# Altium PCB MyECGPCB_V1.2.9.1.PcbDoc
Units mil, origin at the board's own origin, x right, y up, seen from the top; angles counter-clockwise.
Board outline 3250 x 3250 mil, 2 copper layers (Top Layer, Bottom Layer); 151 components, 107 nets, 475 pads, 167 vias.
Unrouted connection lines stored in the file: 65.
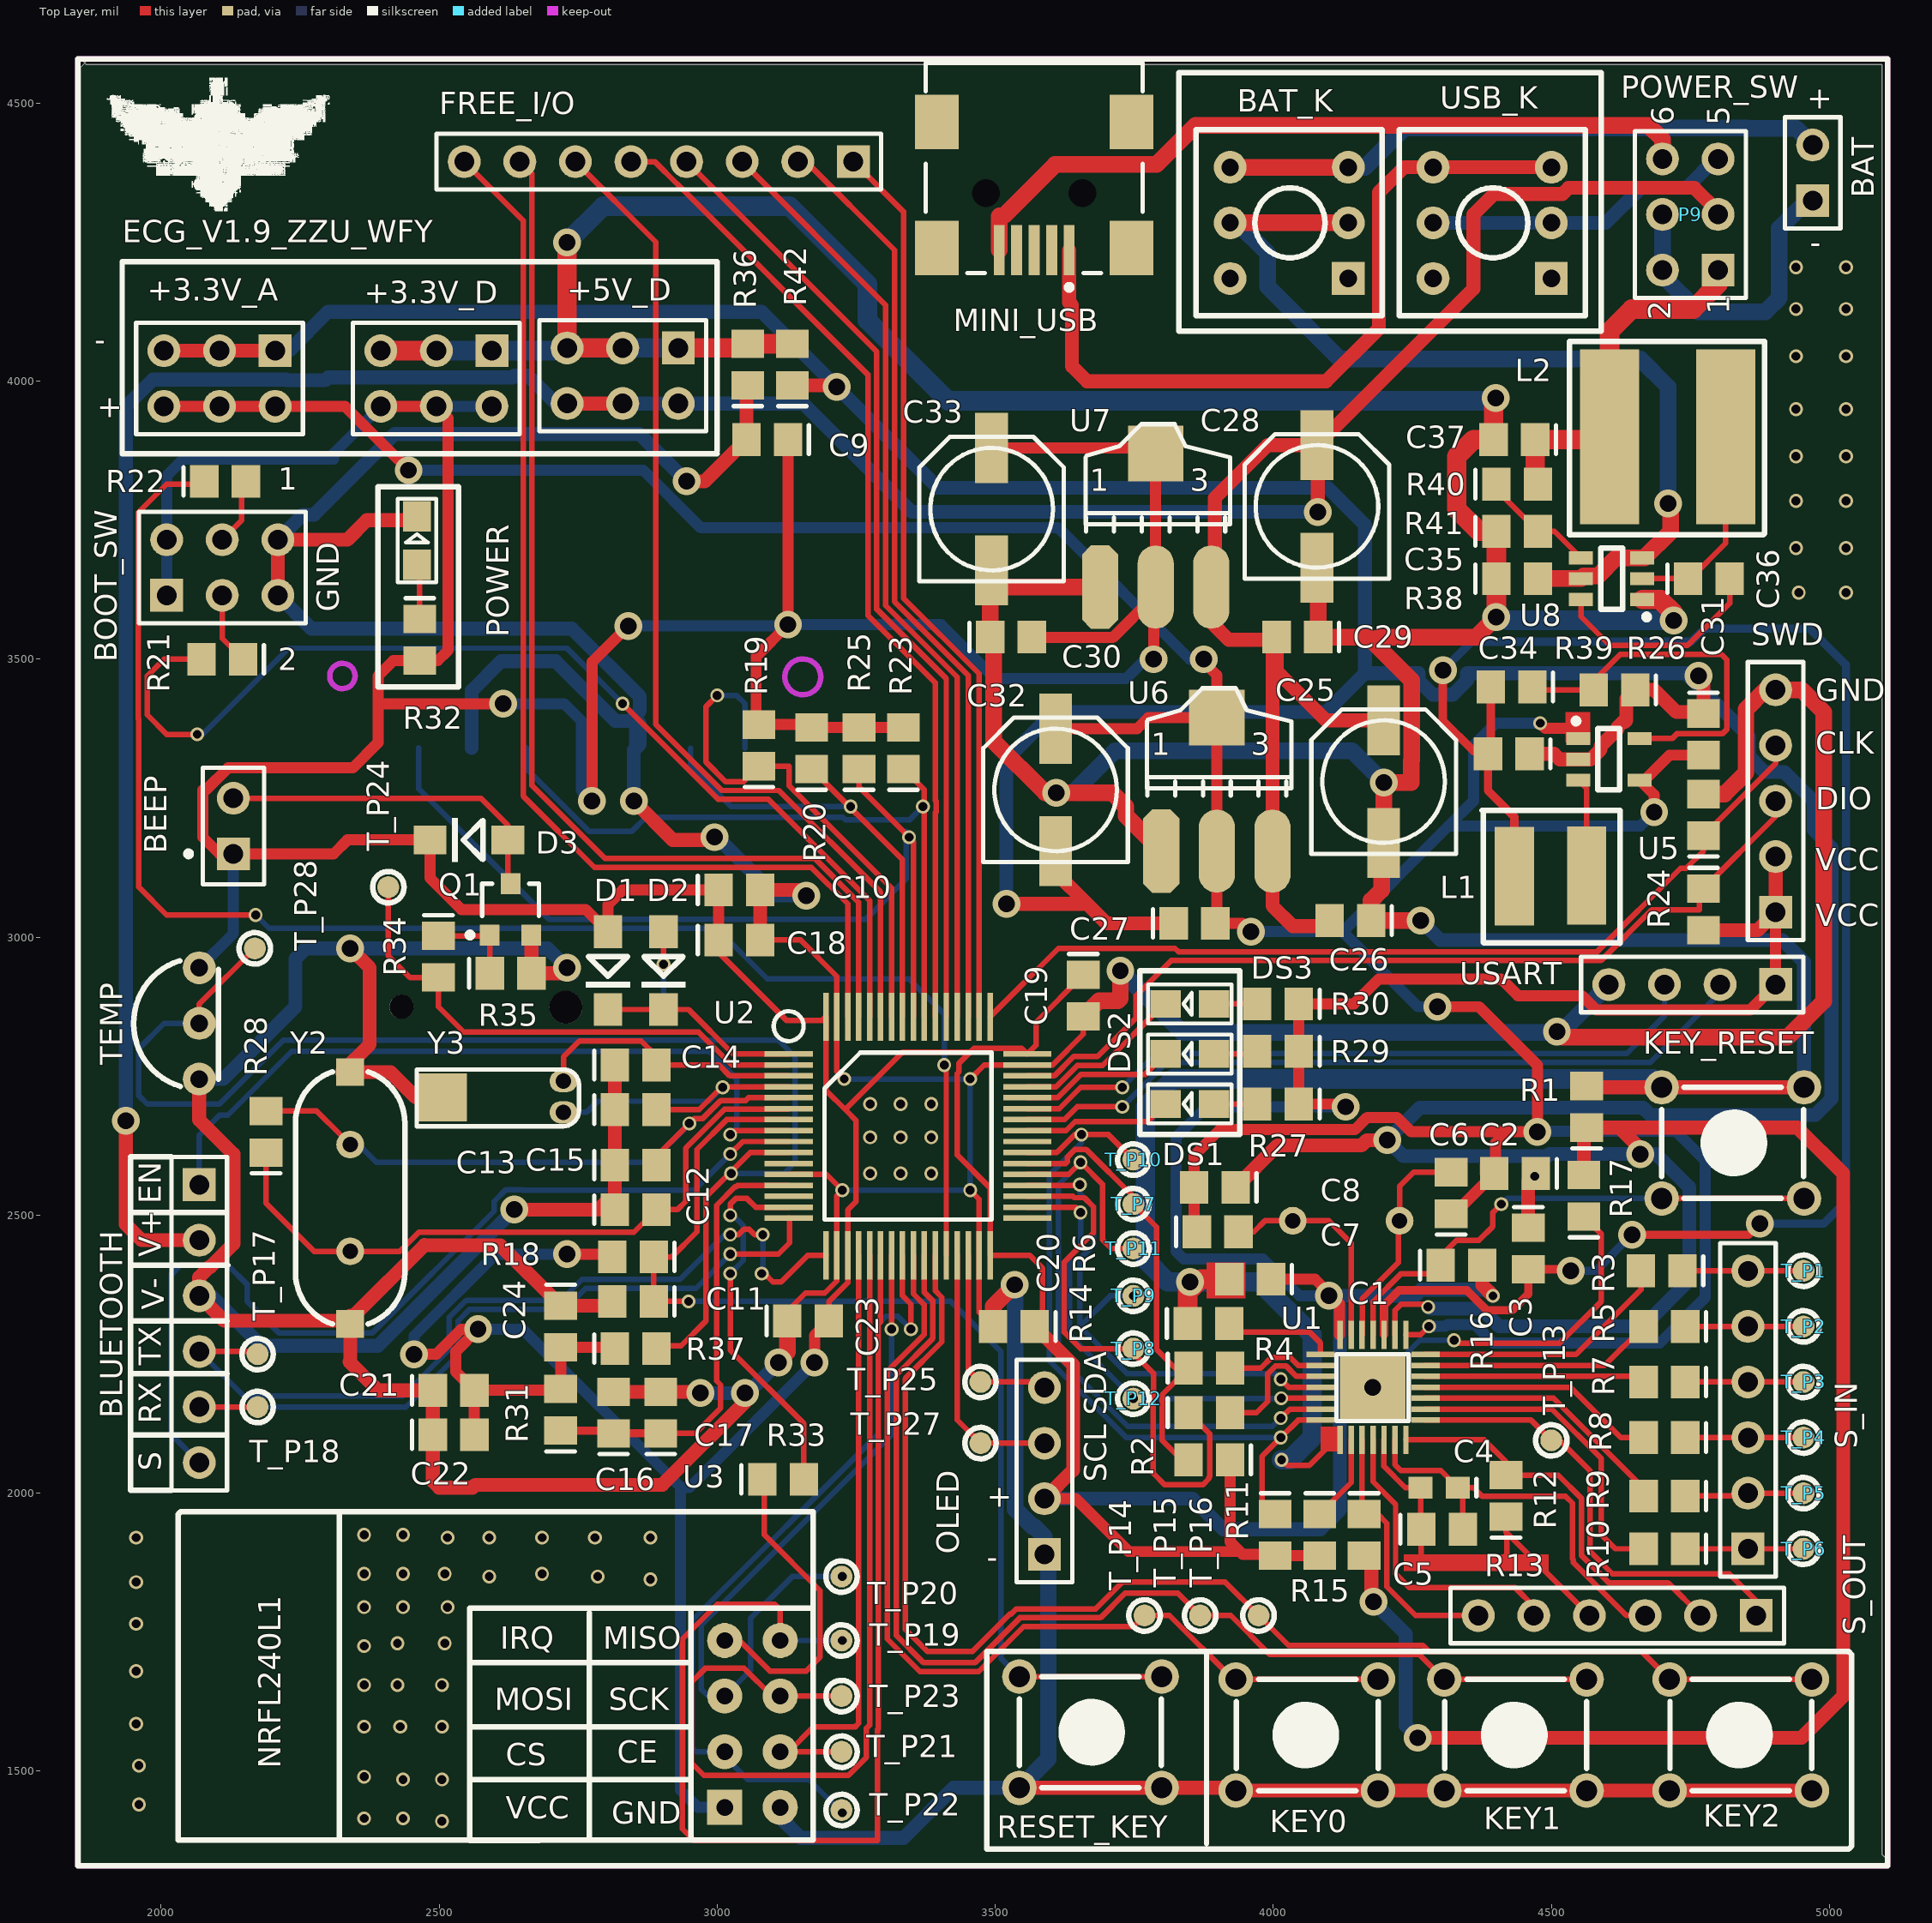
[diagram p0: Top Layer view]
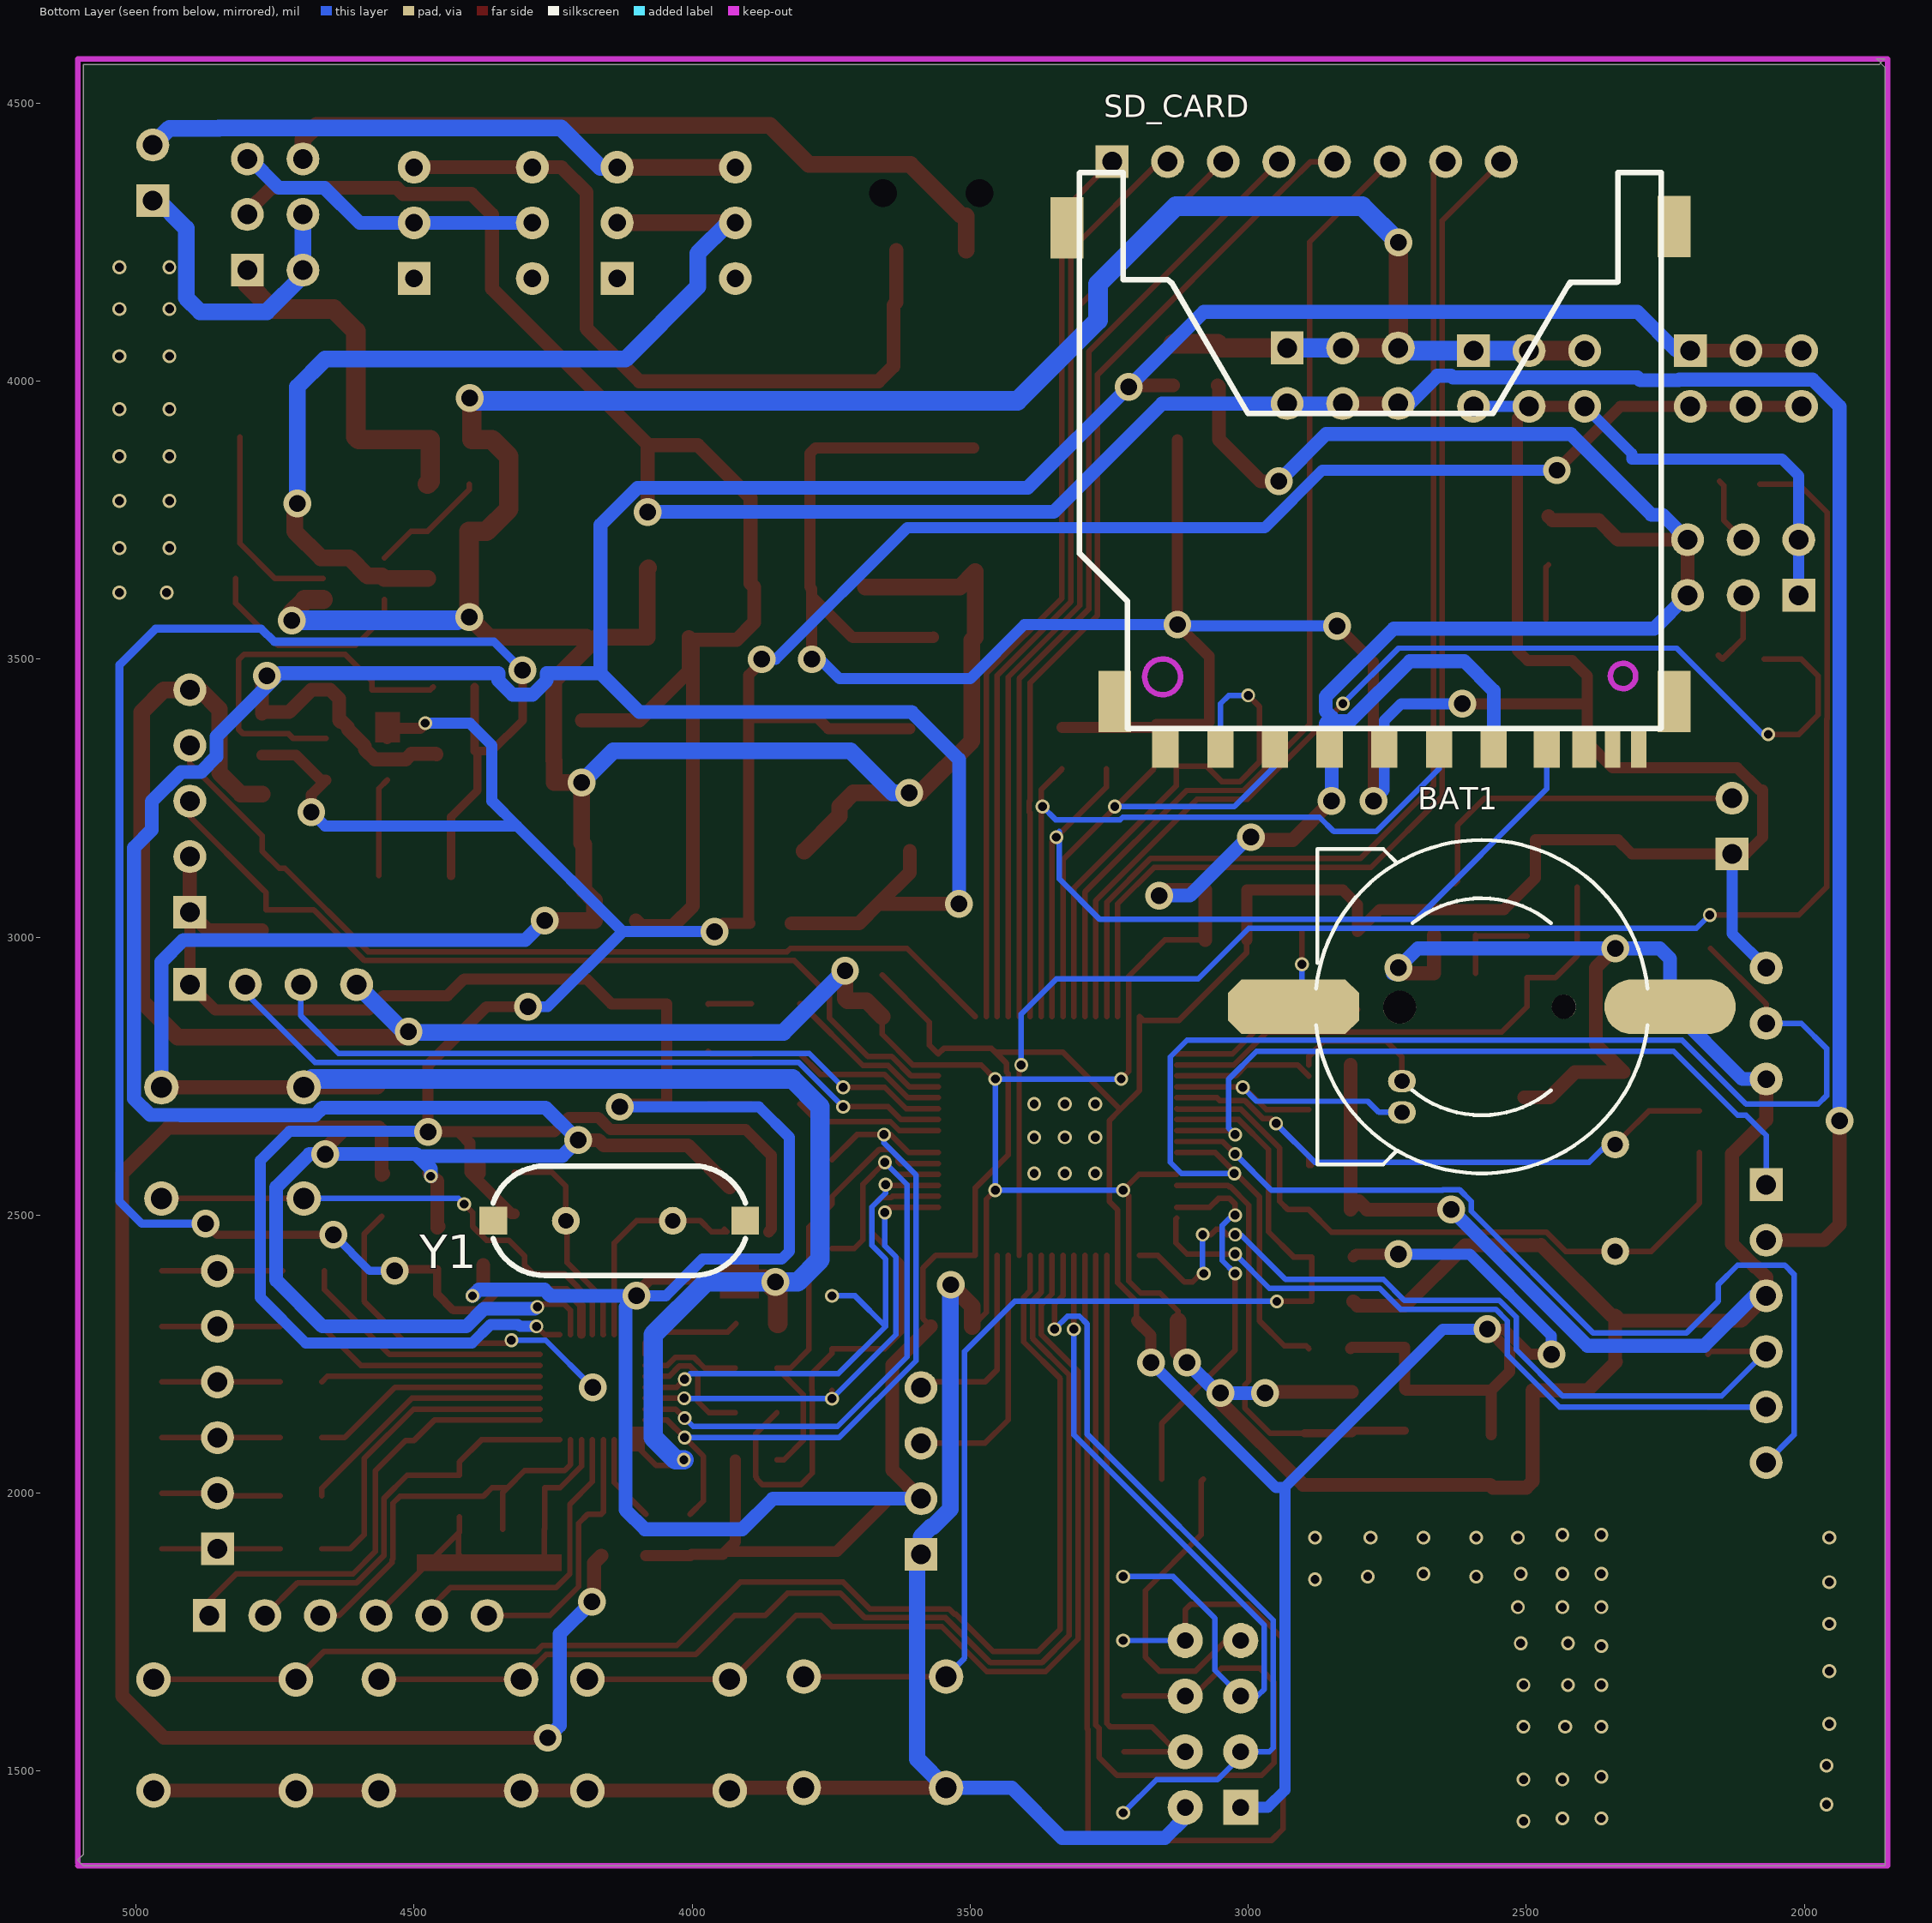
[diagram p1: Bottom Layer view, seen from below]

## Layer stack, top to bottom
Top Solder: solder mask 0.4, Solder Resist, Dk 3.5
Top Layer: signal copper 1.4
Dielectric 1: dielectric 12.6, FR-4, Dk 4.8
Bottom Layer: signal copper 1.4
Bottom Solder: solder mask 0.4, Solder Resist, Dk 3.5

## Board outline
1855,4580 1865,4570 5095,4570 5095,1350 5105,1340 5095,1330 1855,1330 1855,4565 1870,4580

## Design rules (kind name [scope] priority, off if disabled: settings)
Clearance [All] p1: gap=6
PolygonConnect [All] p1: connectstyle=Relief reliefconductorwidth=10 reliefentries=4 polygonreliefangle="90 Angle" airgapwidth=10
RoutingVias [All] p1: holewidth=28 width=50 viastyle="Through Hole" minholewidth=16 minwidth=25 maxholewidth=28 maxwidth=50
SolderMaskExpansion [All] p1: expansion=4
Width [All] p1: maxlimit=40 minlimit=10 preferedwidth=10 minimp=50.000000 maximp=50.000000 favimp=50.000000
30 further rules are at their usual default settings.

## Classes and differential pairs
component class U_PowerSheet: +3.3V_A +3.3V_D +5V_D BAT BAT_K C25 C26 C27 C28 C29 C30 C31 C32 C34 C35 C36 C37 L1 L2 MINI_USB P9 R38 R39 R40 R41 R42 U5 U6 U7 U8 USB_K
component class U_MCUSheet: BAT1 BEEP BLUETOOTH BOOT_SW C9 C10 C11 C12 C13 C14 C15 C16 C17 C18 C19 C20 C21 C22 C23 C24 D1 D2 D3 DS1 DS2 DS3 FREE_I/O KEY0 KEY1 KEY2 OLED POWER Q1 R18 R19 R20 R21 R22 R23 R24 R25 R26 R27 R28 R29 R30 R31 R32 R33 R34 R35 R36 R37 RESET_KEY SD_CARD SWD T_P14 T_P15 T_P16 T_P17 T_P18 T_P19 T_P20 T_P21 T_P22 T_P23 T_P24 T_P25 T_P27 T_P28 TEMP U2 U3 USART Y2 Y3
component class U_FrontEndSheet: C1 C2 C3 C4 C5 C6 C7 C8 KEY_RESET R1 R2 R3 R4 R5 R6 R7 R8 R9 R10 R11 R12 R13 R14 R15 R16 R17 S_IN S_OUT T_P1 T_P2 T_P3 T_P4 T_P5 T_P6 T_P7 T_P8 T_P9 T_P10 T_P11 T_P12 T_P13 U1

## Components (designator, comment, footprint, x,y, rotation, side; value= is the part's Value field where it differs from the comment)
+3.3V_A "+3.3V_A" HDR2X3 2205,4055 r180 top (schematic designator VOUT4)
+3.3V_D "+3.3V_D" HDR2X3 2595,4055 r180 top (schematic designator VOUT3)
+5V_D "+5V_D" HDR2X3 2930,4060 r180 top (schematic designator VOUT2)
BAT "Header 2" HDR1X2 4970,4325 r90 top (schematic designator P8)
BAT1 "BATT" BATM 2580,2875 r270 bottom
BAT_K "BUTTON" BTN8.5*8.5 4135,4185 r180 top (schematic designator K2)
BEEP "Speaker" PIN2 2130,3150 r90 top (schematic designator LS1)
BLUETOOTH "Header 6" HDR1X6 2068.5,2555 r270 top (schematic designator P4)
BOOT_SW "VCC5" HDR2X3 2010,3615 r0 top (schematic designator VOUT1)
C1 "0.1uF" 0805 3958.5,2385 r180 top
C2 "0.1uF" 0805 4435,2575 r180 top
C3 "0.1uF" 0805 4458.5,2440 r270 top
C4 "1nF" 0603 4298.5,2010 r180 top
C5 "0.1uF" 0805 4163.5,1925 r270 top
C6 "22pF" 0805 4320,2540 r90 top
C7 "22pF" 0805 3900,2470 r0 top
C8 "0.1uF" 0805 3895,2550 r180 top
C9 "0.1uf" 0805 3090,3895 r180 top
C10 "0.1uF" 0805 3040,3085 r0 top
C11 "0.1uf" 0805 2848.5,2345 r180 top
C12 "22" 0805 2853.5,2510 r0 top
C13 "22" 0805 2853.5,2690 r0 top
C14 "22" 0805 2853.5,2770 r0 top
C15 "22" 0805 2853.5,2590 r0 top
C16 "10u" 0805 2898.5,2145 r90 top
C17 "0.1uf" 0805 2813.5,2145 r90 top
C18 "0.1uF" 0805 3040,2995 r0 top
C19 "104" 0805 3658.5,2895 r270 top
C20 "104" 0805 3533.5,2300 r180 top
C21 "10uF" 0805 2525.9,2185 r0 top
C22 "104" 0805 2525.9,2105 r0 top
C23 "104" 0805 3163.5,2310 r0 top
C24 "104" 0805 2718.5,2300 r270 top
C25 "220uF" CC6.56.5 4198.5,3280 r270 top
C26 "104" 0805 4138.5,3030 r180 top
C27 "104" 0805 3858.5,3025 r0 top
C28 "220uF" CC6.56.5 4078.5,3775 r270 top
C29 "104" 0805 4043.5,3540 r180 top
C30 "104" 0805 3528.5,3540 r0 top
C31 "4.7uf" 0805 4773.5,3365 r270 top
C32 "220uF" CC6.56.5 3608.5,3265 r270 top
C33 "220uF" CC6.56.5 3493.5,3770 r270 top
C34 "10uf" 0805 4423.5,3330 r180 top
C35 "10uf" 0805 4438.5,3645 r0 top
C36 "100nf" 0805 4783.5,3645 r0 top
C37 "22uf" 0805 4433.5,3895 r180 top
D1 "1N4148" DIODE_SOP 2803.5,3010 r270 top
D2 "1N4148" DIODE_SOP 2903.5,3010 r270 top
D3 "1N4148" DIODE_SOP 2623.5,3175 r180 top
DS1 "LED1" SMDLED 3893.5,2700 r180 top
DS2 "LED1" SMDLED 3893.5,2790 r180 top
DS3 "LED1" SMDLED 3893.5,2880 r180 top
FREE_I/O "Header 8" HDR1X8 3245,4395 r180 top (schematic designator P7)
KEY0 "KEY_M" KEY_M 4188.5,1465 r180 top
KEY1 "KEY_M" KEY_M 4563.5,1465 r180 top
KEY2 "KEY_M" KEY_M 4968.5,1465 r180 top
KEY_RESET "KEY_M" KEY_M 4698.5,2730 r0 top (schematic designator KEY?)
L1 "Inductor" SDR0403 4563.5,3110 r270 top
L2 "Inductor" SDR0805 4813.5,3900 r270 top
MINI_USB "USB" USB/SM0.8-6H5 3570,4545 r90 top (schematic designator USB_?)
OLED "Header 4" HDR1X4 3588.5,1890 r90 top (schematic designator P6)
P9 "Header 3X2" HDR2X3 4800,4200 r90 top
POWER "PWR" SMDLED 2460,3670 r90 top (schematic designator DS0)
Q1 "S8050" SOT-23R 2628.5,3045 r0 top
R1 "0" 0805 4563.5,2695 r90 top
R2 "1M" 0805 3885,2060 r180 top
R3 "0" 0805 4698.5,2400 r180 top
R4 "51" 0805 3885,2225 r0 top
R5 "0" 0805 4703.5,2300 r180 top
R6 "51" 0805 3885,2145 r0 top
R7 "0" 0805 4703.5,2200 r180 top
R8 "0" 0805 4703.5,2100 r180 top
R9 "0" 0805 4703.5,1995 r180 top
R10 "0" 0805 4703.5,1900 r180 top
R11 "1M" 0805 4003.5,1925 r270 top
R12 "10K" 0805 4418.5,1995 r90 top
R13 "10M" 0805 4303.5,1935 r0 top
R14 "1M" 0805 3883.5,2305 r0 top
R15 "1M" 0805 4083.5,1925 r270 top
R16 "1M" 0805 4338.5,2410 r0 top
R17 "0" 0805 4558.5,2535 r90 top
R18 "10K" 0805 2848.5,2425 r180 top
R19 "45K" 0805 3075,3345 r90 top
R20 "45K" 0805 3170,3340 r90 top
R21 "10K" 0805 2110,3500 r180 top
R22 "10K" 0805 2115,3820 r0 top
R23 "45K" 0805 3335,3340 r90 top
R24 "10K" 0805 4773.5,3050 r270 top
R25 "45K" 0805 3255,3340 r90 top
R26 "10K" 0805 4773.5,3220 r90 top
R27 "510" 0805 4008.5,2700 r180 top
R28 "1M" 0805 2188.5,2650 r90 top
R29 "510" 0805 4008.5,2795 r180 top
R30 "510" 0805 4008.5,2880 r180 top
R31 "10" 0805 2718.5,2150 r90 top
R32 "510" 0805 2465,3535 r270 top
R33 "4.7k" 0805 3118.5,2025 r0 top
R34 "1k" 0805 2498.5,2965 r270 top
R35 "10k" 0805 2628.5,2935 r0 top
R36 "0" 0805 3055,4030 r90 top
R37 "4.7K" 0805 2853.5,2260 r0 top
R38 "301K" 0805 4428.5,3450 r180 top
R39 "100K" 0805 4613.5,3445 r180 top
R40 "56.2K" 0805 4438.5,3815 r0 top
R41 "10K" 0805 4438.5,3730 r0 top
R42 "0" 0805 3135,4030 r90 top
RESET_KEY "KEY_M" KEY_M 3543.5,1670 r0 top
S_IN "输入" HDR1X6 4853.5,1900 r90 top (schematic designator P1)
S_OUT "Header 6" HDR1X6 4868.5,1780 r180 top (schematic designator P2)
SD_CARD "sd card" SDCARD_L 3050,3340 r0 bottom (schematic designator SD_CARD?)
SWD "Header 5" HDR1X5 4903.5,3045 r90 top (schematic designator P3)
T_P1 "Test_Pad" PCB_Test_Pad 4953.5,2400 r90 top
T_P2 "Test_Pad" PCB_Test_Pad 4953.5,2300 r90 top
T_P3 "Test_Pad" PCB_Test_Pad 4953.5,2200 r90 top
T_P4 "Test_Pad" PCB_Test_Pad 4953.5,2100 r90 top
T_P5 "Test_Pad" PCB_Test_Pad 4953.5,2000 r90 top
T_P6 "Test_Pad" PCB_Test_Pad 4953.5,1900 r90 top
T_P7 "Test_Pad" PCB_Test_Pad 3748.5,2520 r90 top
T_P8 "Test_Pad" PCB_Test_Pad 3748.5,2260 r90 top
T_P9 "Test_Pad" PCB_Test_Pad 3748.5,2355 r90 top
T_P10 "Test_Pad" PCB_Test_Pad 3748.5,2600 r90 top
T_P11 "Test_Pad" PCB_Test_Pad 3748.5,2440 r90 top
T_P12 "Test_Pad" PCB_Test_Pad 3748.5,2170 r90 top
T_P13 "Test_Pad" PCB_Test_Pad 4500,2095 r90 top
T_P14 "Test_Pad" PCB_Test_Pad 3768.5,1780 r90 top
T_P15 "Test_Pad" PCB_Test_Pad 3868.5,1780 r90 top
T_P16 "Test_Pad" PCB_Test_Pad 3973.5,1780 r90 top
T_P17 "Test_Pad" PCB_Test_Pad 2173.5,2250 r270 top
T_P18 "Test_Pad" PCB_Test_Pad 2173.5,2155 r270 top
T_P19 "Test_Pad" PCB_Test_Pad 3223.5,1735 r270 top
T_P20 "Test_Pad" PCB_Test_Pad 3223.5,1850 r270 top
T_P21 "Test_Pad" PCB_Test_Pad 3223.5,1535 r270 top
T_P22 "Test_Pad" PCB_Test_Pad 3223.5,1430 r270 top
T_P23 "Test_Pad" PCB_Test_Pad 3223.5,1635 r270 top
T_P24 "Test_Pad" PCB_Test_Pad 2408.5,3090 r90 top
T_P25 "Test_Pad" PCB_Test_Pad 3473.5,2200 r270 top
T_P27 "Test_Pad" PCB_Test_Pad 3473.5,2090 r90 top
T_P28 "Test_Pad" PCB_Test_Pad 2168.5,2980 r270 top
TEMP "DS18B20" DS18B20 2068.5,2745 r90 top (schematic designator U4)
U1 "ADS1293" SQA28A 4238.5,2285 r270 top
U2 "STM32F103RCT6" LQFP64 3128.5,2790 r0 top
U3 "NRF24L01" NRF24L01 3113.5,1435 r0 top
U5 "TLV62568" LC-SOT-23-5 4603.5,3320 r180 top
U6 "AMS1117-3.3" AMS1117 3798.5,3155 r0 top
U7 "AMS1117-3.3" AMS1117 3688.5,3630 r0 top
U8 "TPS562200DDC" LC-SOT-23-6 4608.5,3645 r0 top
USART "Header 4" HDR1X4 4903.5,2915 r180 top (schematic designator P5)
USB_K "BUTTON" BTN8.5*8.5 4500,4185 r180 top (schematic designator K1)
Y1 "XTAL/4.098" XTAL_US 4035,2490 r0 bottom
Y2 "8MHz" XTAL_US 2340,2435 r90 top
Y3 "32.768kHz" XTAL32 2723.5,2685 r180 top

## Footprints (in the part's own frame and the unit in brackets; to place one, negate y for a bottom-side part, rotate by r counter-clockwise, add the part's x,y. Pads: shape width x height; smd on the part's side, far side on the other; paste and mask are expansions set on the pad)
0603 [mm] "Chip Capacitor; Body 1.6 x 0.8 mm (LxW typ)"
  rect 1.1x1 smd: 1(-0.85,0) 2(0.85,0)
  silkscreen extent -1.7,-0.4 -1.7,0.4
0805 [mm] "Chip Capacitor; Body 2.0 x 1.2 mm (LxW typ)"
  rect 1.3x1.5 smd: 1(-0.95,0) 2(0.95,0)
  silkscreen extent -1.9,-0.65 -1.9,0.65
AMS1117 [mil]
  oct 65x150 smd: 1(0.03,-0.06)
  oval 65x150 smd: 2(100.03,-0.06) 3(200.03,-0.06)
  rect 100x100 smd: 4(100.03,239.94)
  silkscreen extent -26,100 234,293
BATM [mm]
  round 1.1 hole 1.1 unplated: 0(0,3.748)
  round 1.5 hole 1.5 unplated: 0(0.025,-3.752)
  oct 2.5x6 smd: 1(0,-8.602)
  oval 2.5x6 smd: 2(0,8.598)
  silkscreen extent -7.62,-7.58 7.62,7.57
BTN8.5*8.5 [mm]
  rect 1.5x1.5 hole 0.8: 1(0,0)
  round 1.5 hole 0.8: 2(0,-2.54) 3(0,-5.08) 4(5.4,-5.08) 5(5.4,-2.54) 6(5.4,0)
  silkscreen extent -1.55,-6.79 6.95,1.71
CC6.56.5 [mm]
  rect 3.2x1.5 smd: 1(-2.794,0) 2(2.8,0)
  silkscreen extent -3.3,-3.3 3.3,3.3
DIODE_SOP [mm]
  rect 1.5x1.3 smd: 1(0,0) 2(3.556,0)
  silkscreen extent 1.14,-1.02 2.56,1.02
DS18B20 [mm]
  round 1.5 hole 0.8: 1(0,0) 2(2.54,0) 3(5.08,0)
  silkscreen extent -0.33,-0.87 5.41,3
HDR1X2 [mm] "Connector; Header; 2 Position"
  rect 1.5x1.5 hole 0.9: 1(0,0)
  round 1.5 hole 0.9: 2(2.54,0)
  silkscreen extent -1.27,-1.27 3.81,1.27
HDR1X4 [mm] "Connector; Header; 4 Position"
  rect 1.5x1.5 hole 0.9: 1(0,0)
  round 1.5 hole 0.9: 2(2.54,0) 3(5.08,0) 4(7.62,0)
  silkscreen extent -1.27,-1.27 8.89,1.27
HDR1X5 [mm] "Connector; Header; 5 Position"
  rect 1.5x1.5 hole 0.9: 1(0,0)
  round 1.5 hole 0.9: 2(2.54,0) 3(5.08,0) 4(7.62,0) 5(10.16,0)
  silkscreen extent -1.27,-1.27 11.43,1.27
HDR1X6 [mm] "Connector; Header; 6 Position"
  rect 1.5x1.5 hole 0.9: 1(0,0)
  round 1.5 hole 0.9: 2(2.54,0) 3(5.08,0) 4(7.62,0) 5(10.16,0) 6(12.7,0)
  silkscreen extent -1.27,-1.27 13.97,1.27
HDR1X8 [mm] "Connector; Header; 8 Position"
  rect 1.5x1.5 hole 0.9: 1(0,0)
  round 1.5 hole 0.9: 2(2.54,0) 3(5.08,0) 4(7.62,0) 5(10.16,0) 6(12.7,0) 7(15.24,0) 8(17.78,0)
  silkscreen extent -1.27,-1.27 19.05,1.27
HDR2X3 [mm]
  rect 1.5x1.5 hole 0.9: 1(0,0)
  round 1.5 hole 0.9: 2(0,2.54) 3(2.54,0) 4(2.54,2.54) 5(5.08,0) 6(5.08,2.54)
  silkscreen extent -1.27,-1.27 6.35,3.81
KEY_M [mil]
  round 62 hole 38: 1(0,0) 1(255.91,0) 2(0,-200) 2(255.91,-200)
  silkscreen extent 0,-200 255,0
LC-SOT-23-5 [mm]
  rect 1.1x0.6 smd: 1(1.4,-0.95) 2(1.4,0) 3(1.4,0.95) 4(-1.4,0.95) 5(-1.4,-0.95)
  silkscreen extent -0.5,-1.87 1.62,1.4
LC-SOT-23-6 [mm]
  rect 1.1x0.6 smd: 1(1.4,-0.95) 2(1.4,0) 3(1.4,0.95) 4(-1.4,0.95) 5(-1.4,0) 6(-1.4,-0.95)
  silkscreen extent -0.5,-1.87 1.73,1.4
LQFP64 [mm]
  rect 2.2x0.254 smd: 1(0,0) 2(0,-0.5) 3(0,-1) 4(0,-1.5) 5(0,-2) 6(0,-2.5) 7(0,-3) 8(0,-3.5) 9(0,-4) 10(0,-4.5) 11(0,-5) 12(0,-5.5) 13(0,-6) 14(0,-6.5) 15(0,-7) 16(0,-7.5) 33(10.9,-7.5) 34(10.9,-7) 35(10.9,-6.5) 36(10.9,-6) 37(10.9,-5.5) 38(10.9,-5) 39(10.9,-4.5) 40(10.9,-4) 41(10.9,-3.5) 42(10.9,-3) 43(10.9,-2.5) 44(10.9,-2) 45(10.9,-1.5) 46(10.9,-1) 47(10.9,-0.5) 48(10.9,0)
  rect 0.254x2.2 smd: 17(1.7,-9.2) 18(2.2,-9.2) 19(2.7,-9.2) 20(3.2,-9.2) 21(3.7,-9.2) 22(4.2,-9.2) 23(4.7,-9.2) 24(5.2,-9.2) 25(5.7,-9.2) 26(6.2,-9.2) 27(6.7,-9.2) 28(7.2,-9.2) 29(7.7,-9.2) 30(8.2,-9.2) 31(8.7,-9.2) 32(9.2,-9.2) 49(9.2,1.7) 50(8.7,1.7) 51(8.2,1.7) 52(7.7,1.7) 53(7.2,1.7) 54(6.7,1.7) 55(6.2,1.7) 56(5.7,1.7) 57(5.2,1.7) 58(4.7,1.7) 59(4.2,1.7) 60(3.7,1.7) 61(3.2,1.7) 62(2.7,1.7) 63(2.2,1.7) 64(1.7,1.7)
  silkscreen extent -0.68,-7.56 9.26,1.95
NRF24L01 [mm]
  round 1.6 hole 0.762: 1(0,0) 3(0,2.54) 4(-2.54,2.54) 5(0,5.08) 6(-2.54,5.08) 7(0,7.62) 8(-2.54,7.62)
  rect 1.6x1.6 hole 0.762: 2(-2.54,0)
  silkscreen extent -27.5,-1.5 1.5,13.5
PCB_Test_Pad [mm]
  round 1 smd: 1(0,0)
  silkscreen extent -0.72,-0.72 0.72,0.72
PIN2 [mm] "Photosensitive Diode; 2 Leads"
  rect 1.5x1.5 hole 0.9: 1(0,0)
  round 1.5 hole 0.9: 2(2.54,0)
  silkscreen extent -1.4,-1.4 3.94,2.17
SDCARD_L [mm]
  rect 1.2x1.8 smd: 1(0,0) 2(-2.489,0) 3(-4.983,-0.009) 4(-7.483,-0.009) 5(-9.983,-0.009) 6(-12.483,-0.009) 7(-14.908,-0.009) 9(2.517,-0.009)
  rect 1.1x1.8 smd: 8(-16.612,0)
  rect 0.7x1.8 smd: 10(-17.908,-0.009) 12(-19.101,0)
  rect 1.5x2.8 smd: 11(-20.726,-23.834) 11(-20.726,-2.143) 11(4.826,-2.143) 11(7.01,-23.784)
  Keep-Out Layer circle w0.254: c2.642,-3.26 r0.82
  Keep-Out Layer circle w0.254: c-18.39,-3.3 r0.58
  silkscreen extent -20.13,-26.3 6.44,-0.9
SDR0403 [mm]
  rect 4.5x1.8 smd: 1(-0.025,0) 2(0,-3.3)
  silkscreen extent -3,-4.78 3.07,1.52
SDR0805 [mm]
  rect 8x2.7 smd: 1(0,0) 2(0,-5.3)
  silkscreen extent -4.37,-7.14 4.47,1.78
SMDLED [mm]
  rect 1.4x1.27 smd: 1(0.001,-0.002) 2(2.211,-0.002)
  silkscreen extent -0.8,-0.89 3.01,0.89
SOT-23R [mm]
  rect 0.9x0.95 smd: 1(0.95,-1.048) 2(-0.95,-1.048) 3(0,1.302)
  silkscreen extent -1.98,-1.17 1.3,1.3
SQA28A [mm]
  rect 0.25x1.3 smd: 1(0.9,0.9) 2(1.4,0.9) 3(1.9,0.9) 4(2.4,0.9) 5(2.9,0.9) 6(3.4,0.9) 7(3.9,0.9) 15(3.9,-3.9) 16(3.4,-3.9) 17(2.9,-3.9) 18(2.4,-3.9) 19(1.9,-3.9) 20(1.4,-3.9) 21(0.9,-3.9)
  rect 1.3x0.25 smd: 8(4.8,0) 9(4.8,-0.5) 10(4.8,-1) 11(4.8,-1.5) 12(4.8,-2) 13(4.8,-2.5) 14(4.8,-3) 22(0,-3) 23(0,-2.5) 24(0,-2) 25(0,-1.5) 26(0,-1) 27(0,-0.5) 28(0,0)
  rect 3.002x3.002 smd: 29(2.413,-1.524)
  silkscreen extent 0.89,-3.17 3.94,0.13
USB/SM0.8-6H5 [mm]
  rect 2.3x0.5 smd: 1(-7.85,-1.6) 2(-7.85,-0.8) 3(-7.85,0) 4(-7.85,0.8) 5(-7.85,1.6)
  rect 2.5x2 smd: 6(-7.75,4.45) 7(-1.996,4.45) 8(-7.75,-4.45) 9(-1.996,-4.45)
  round 0.6 hole 1.27 unplated: MH1(-5.25,2.2) MH2(-5.25,-2.2)
  silkscreen extent -9.67,-4.95 0.7,4.95
XTAL32 [mil]
  oval 50x40 hole 28: 1(0,0) 2(0,-56)
  rect 92.13x86 smd: ""(220,-27)
  silkscreen extent -28,-77 264,25
XTAL_US [mil]
  round 50 hole 28: 1(0,0) 2(192.13,0)
  rect 50x50 smd: ""(-130.32,0) ""(322.44,0)
  silkscreen extent -131,-98 323,98

## Part data
+3.3V_A +3.3V_D +5V_D BOOT_SW: library part "Header 3X2", "Header, 3-Pin, Dual row"
BAT: "Header, 2-Pin"
BAT1: library part BAT
BEEP: "Loudspeaker"
BLUETOOTH S_OUT: "Header, 6-Pin"
C1 C2 C3 C4 C5 C6 C7 C8 C9 C10 C11 C12 C13 C14 C15 C16 C17 C18 C19 C20 C21 C22 C23 C24 C26 C27 C29 C30 C35 C36 C37: library part C
C25 C28 C32 C33: library part CAP
C31: library part C, "Cap= 4.7 uF  ESR= 2.0 mOhm  VDC= 25.0 V  IRMS= 7.29 A"
C34: library part C, "Cap= 10.0 uF  ESR= 2.0 mOhm  VDC= 6.3 V  IRMS= 0.0 A"
D1 D2 D3: library part D
DS1 DS2 DS3 POWER: library part LED2, "Typical RED, GREEN, YELLOW, AMBER GaAs LED"
FREE_I/O: "Header, 8-Pin"
L1 L2: "L= 2.2 μH  DCR= 47.0 mOhm"
MINI_USB: library part USB5
OLED USART: "Header, 4-Pin"
P9: "Header, 3-Pin, Dual row"
Q1: library part NPN, "8050/BCW846/BCW847"
R1 R2 R3 R4 R5 R6 R7 R8 R9 R10 R11 R12 R13 R14 R15 R16 R17 R18 R19 R20 R21 R22 R23 R24 R25 R26 R27 R28 R29 R30 R31 R32 R33 R34 R35 R36 R37 R42: library part R
R38 R40 R41: library part R, "Res= 100.0 kOhm  Power= 125.0 mW  Tolerance= 1.0%"
R39: library part R, "Res= 301.0 kOhm  Power= 125.0 mW  Tolerance= 1.0%"
S_IN: library part "Header 6", "Header, 6-Pin"
SWD: "Header, 5-Pin"
U2: library part STM32F103RDT6
U6 U7: library part AMS1117
Y1 Y2 Y3: library part XTAL, "Crystal Oscillator"

## Via types
v1: diameter 25, hole 16, Top Layer to Bottom Layer, 114 vias
v2: diameter 50, hole 30, Top Layer to Bottom Layer, 53 vias

## Nets (pads, with @x,y where several pads share a name; then routed paths per layer and width w, separated by ;. In a path a pad name is that pad's centre, name@x,y a point inside that pad or via, vN(x,y) a via of type N, cw(c..) or ccw(c..) an arc to the next point about the centre after c; other vN are vias at no path point)
18B20_CTR: R37.2 T_P28.1 TEMP.2 U2.10 | length 2462.5
  Top Layer w10: TEMP.2 2068.5,2880 T_P28.1 ; R37.2 2895.9,2265 2935,2265 2979.5,2309.5 2979.5,2532.77 3059.57,2612.83 U2.10
  Bottom Layer w10: TEMP.2 2005,2845 1960,2800 1960,2715 1975,2700 2105,2700 2219.79,2814.79 3110.21,2814.79 3140,2785 3140,2595 3120,2575 v1(3025,2575)
+2.4V_A: C3.2 C34.2 L1.2 R38.2 U1.26 | length 3320.8
  Top Layer w15: U1.26 4199.13,2337.97 4226.16,2365 4348.23,2365 4384.23,2329 4429.41,2329 4458.5,2358.09 C3.2 4532.4,2402.6 v2(4535,2400) ; v2(4305,3480) 4305,3390 4360,3335 C34.2@4391.1,3335 ; R38.2 C34.2@4391.1,3335 ; L1.2 4433.58,3216.42 4386.1,3263.9 C34.2 C34.2@4391.1,3335 ; v2(4645,2465) 4855,2465 v2@4870,2480
  Bottom Layer w15: v2(4305,3480) 4356.5,3531.5 4751.5,3531.5 4775,3555 4965,3555 5029.91,3490.09 5029.91,2524.91 4990,2485 v2(4875,2485) ; v2(4535,2400) 4580,2400 v2(4645,2465)
+3.3V_A: +3.3V_A.2 +3.3V_A.4 +3.3V_A.6 C2.2 C6.1 C7.1 C8.2 C27.2 C31.2 C32.1 U1.28 U5.1 U5.4 U6.2 U6.4 | length 7041.3
  Top Layer w10: U1.28 4265,2285 v1(4280,2300)
  Top Layer w20: +3.3V_A.6 +3.3V_A.4 +3.3V_A.2 2330.61,3955 2445,3840.61 v2(2445,3840) ; C32.1 3755,3375 3775,3395 3898.47,3395 U6.4 ; C7.1 3857.6,2475 C8.2 3857.6,2607.6 3904,2654 4146.98,2654 4168.98,2676 4221.98,2676 4247.98,2650 v2(4475,2650) 4475,2770 4370,2875 v2(4295,2875) ; v2(3875,3500) 3875,3495 3898.53,3471.47 U6.4 ; v2(3960,3010) 3945,3025 C27.2 3898.53,3027.63 U6.2 U6.4 ; C6.1 4325.2,2502.6 C2.2 4400,2577.4 4400,2630 4416,2646 ; C2.2@4381.1,2575 C2.2@4381.1,2591.1 ; v1(4480,3385) 4489.47,3375.53 4530.26,3375.53 U5.1 ; v2(4685,3225) 4685,3256.22 U5.4 4667.6,3282.6 4712.6,3327.6 C31.2
  Bottom Layer w20: v2(2445,3840) 2867.02,3840 2970.52,3736.5 3613.5,3736.5 3850,3500 v2(3875,3500) ; v2(3960,3010) 4125,3010 ; v1(4280,2300) 4309.69,2300 4313.19,2303.5 4362.35,2303.5 4395.85,2270 4695,2270 4776.5,2351.5 4776.5,2598.5 4724,2651 4476,2651 v2(4475,2650) ; v2(4295,2875) 4260,2875 4125,3010 ; v1(4480,3385) 4400,3385 4360,3345 4360,3245 4315,3200 ; v2(4685,3225) 4660,3200 4315,3200 ; 4125,3010 4315,3200
+3.3V_D: +3.3V_D.2 +3.3V_D.4 +3.3V_D.6 BEEP.1 BOOT_SW.1 BOOT_SW.2 C1.1 C9.1 C10.1 C18.1 C19.1 C20.1 C21.2 C22.2 C23.2 C24.2 C30.2 C33.1 D1.1 D3.2 OLED.2 R2.1 R11.2 R15.2 R16.2 R18.2 R19.2 R20.2 R23.2 R24.2 R25.2 R27.1 R29.1 R30.1 R31.2 R32.2 R37.1 SD_CARD.4 SWD.1 SWD.2 TEMP.3 U1.22 U2.19 U2.32 U2.48 U2.64 U3.2 U7.2 U7.4 USART.1 | length 16747.9
  Top Layer w10: C18.1 3002.6,2972.4 3125,2850 3188.5,2850 U2.64 3195.43,2724.57 3232.5,2687.5 ; C23.2 3200.9,2344.77 3234.8,2378.67 U2.19 3234.8,2509.8 3250,2525 3250,2670 3232.5,2687.5 ; C20.1 3585,2314.1 3585,2405 3562.2,2427.8 U2.32 3490.7,2549.3 3431.5,2608.5 3431.5,2754.73 3435,2758.23 3435,2773.5 3455,2793.5 ; C19.1 3573.5,2847.4 3573.5,2805.87 U2.48 3547.63,2800 3461.5,2800 3455,2793.5 ; 3232.5,2687.5 3232.5,2692.5 3333.5,2793.5 3455,2793.5
  Top Layer w20: +3.3V_D.6 +3.3V_D.4 2516,3934 2516,3516 2497.6,3497.6 R32.2 2417.6,3497.6 2390,3470 2390,3425 ; v2(2455,2250) 2495,2250 2540,2295 v2(2570,2295) 2530.09,2255.09 2530.09,2218.21 C21.2 ; C22.2 C21.2 ; v2(2615,3420) 2395,3420 2390,3425 ; v2(2730,2430) 2806.1,2430 R18.2 ; v2(2775,3245) 2775,3495 v2(2840,3560) ; R37.1 2813.5,2262.6 C24.2 R31.2 2716.1,2185 C21.2 ; C18.1 C10.1 2830,3085 2803.5,3058.5 D1.1 2763.5,3050 2540,3050 2483.5,3106.5 D3.2 2335,3175 2310,3150 BEEP.1 2105,3150 2075,3180 2075,3265 2080.61,3265 2120.61,3305 2345,3305 2390,3350 2390,3425 ; C9.1 v2(3127.4,3562.4) 3070,3505 3070,3387.4 R19.2 3165,3382.4 R20.2 R25.2 R23.2 ; v2(3175,2235) 3175,2284.1 C23.2 ; C33.1 3778.47,3880 U7.4 U7.2 3785,3626.4 U7.2@3785,3612.53 ; C30.2 3565.9,3538.94 3711.41,3538.94 U7.2@3785,3612.53 ; OLED.2 3645,1990 3740,1895 3940,1895 ; v2(3785,3500) U7.2@3785,3612.53 ; R2.1 3922.4,1912.6 3940,1895 ; C1.1 4075,2385 4119.07,2340.93 U1.22@4119.07,2285 ; R15.2 R11.2 4001.1,1890 3945,1890 3940,1895 ; v2(4130,2695) 4125,2700 R27.1 R29.1 R30.1 4145,2880 4190,2925 4410,2925 4440,2895 4555,2895 4580.53,2869.47 4857.97,2869.47 USART.1 SWD.1
  Top Layer w25: C20.1 3640,2230.9 3640,2041.5 OLED.2 ; R16.2 4375.9,2374.1 v1(4395,2355) ; R24.2 4871.1,3012.6 SWD.1 SWD.2
  Bottom Layer w20: BOOT_SW.1 BOOT_SW.2 2010,3830 2040,3860 2295,3860 2310,3860 2310,3870 +3.3V_D.6 ; TEMP.3 2130,3006.5 BEEP.1 ; v2(2455,2250) 2455,2283.24 2601.76,2430 v2(2730,2430) ; +3.3V_D.4 +3.3V_D.2 ; v2(2570,2295) 2650,2295 2934,2011 2934,2010 ; v2(2615,3420) 2725,3420 2755.39,3389.61 SD_CARD.4 2755.39,3264.61 v2(2775,3245) ; v2(2840,3560) 3125,3560 v2(3127.4,3562.4) 3402.6,3562.4 3500,3465 3735,3465 3770,3500 v2(3785,3500) ; U3.2 2965,1435 2934,1466 2934,2010 ; v2(3175,2235) 2950,2010 2934,2010 ; v2(4100,2355) 4047.38,2355 3981.38,2421 3839,2421 3825,2435 3825,2640 3880,2695 v2(4130,2695)
  Bottom Layer w25: OLED.2 3855,1990 3910,1935 4085,1935 4120,1970 4120,2335 v2(4100,2355) 4254.66,2355 4265.66,2366 4384,2366 v1(4395,2355)
AGND: +3.3V_A.1 +3.3V_A.3 +3.3V_A.5 C2.1 C3.1 C5.2 C8.1 C27.1 C31.1 C32.2 C34.1 R1.1 R17.2 R39.1 R42.1 U1.27 U5.2 | length 11530.5
  Top Layer w10: U1.27 4218.81,2328.82 4230,2340 4273.5,2340 v1(4278.5,2335)
  Top Layer w25: +3.3V_A.5 +3.3V_A.3 +3.3V_A.1 ; R42.1 3212.4,3992.6 v2(3215,3990) ; v2(3520,3060) 3665,3060 ; C32.2 3608.5,3116.5 3665,3060 ; C27.1 3700,3025 3665,3060 ; C8.1 4007.9,2625.5 4158.79,2625.5 4168.29,2635 v2(4205,2635) ; C5.2 4176.5,1874.6 4176.5,1808.5 v2(4180,1805) ; v2(4260,1560) 4950,1560 5025,1635 5025,2575 4942.4,2657.6 4622.4,2657.6 ; C3.1@4455.9,2480 C3.1 4458.5,2561.1 C2.1 ; C34.1@4460,3329.1 C34.1 4505,3330 4515,3320 U5.2 4570.61,3320 4588.54,3337.93 4588.54,3343.54 4618.46,3373.46 4618.46,3376.88 4629.3,3387.71 4632.71,3387.71 4635,3390 4635,3429.1 R39.1 4685,3445 4725,3405 4770.9,3405 C31.1 4773.5,3461.5 v2(4765,3470) ; R17.2@4555.9,2575 R17.2 4558.5,2652.6 R1.1 4622.4,2657.6 ; v2(4660,2610) 4660,2620 4622.4,2657.6
  Bottom Layer w25: +3.3V_A.1 2230,4055 2300,4125 3080,4125 v2(3215,3990) 3396.5,3808.5 4098.02,3808.5 4165,3741.52 4165,3475 ; v2(3520,3060) 3520,3320 3605,3405 4095,3405 4165,3475 ; v2(4180,1805) 4238,1747 4238,1582 v2(4260,1560) ; v1@4283,2332 4374.16,2332 4406.16,2300 4665,2300 4748,2383 4748,2550.5 4688.5,2610 v2(4660,2610) 4496.52,2610 4493.02,2606.5 ; v1(4470,2570) 4470,2583.48 4493.02,2606.5 ; 4165,3475 4261.5,3475 4261.5,3461.98 4286.98,3436.5 4323.02,3436.5 4348.5,3461.98 4348.5,3475 4741.42,3475 4855.47,3360.95 4855.47,3325.11 4883.61,3296.97 4919.45,3296.97 4971.97,3244.45 4971.97,3193.03 5003.91,3161.09 5003.91,2709.5 4974.91,2680.5 4920.5,2680.5 4920,2680 4678.5,2680 4665,2693.5 4263.5,2693.5 v2(4205,2635) 4233.5,2606.5 4493.02,2606.5
BAT+: BAT.2 BAT_K.3 BAT_K.4 | length 1089.5
  Top Layer w30: BAT_K.4 BAT_K.3
  Bottom Layer w30: BAT_K.3 4165,4385 4235.53,4455.53 4850.93,4455.53 4851.46,4455 4940,4455 BAT.2
BAT+_K: BAT_K.2 BAT_K.5 C35.2 U8.3 U8.5 | length 1693.9
  Top Layer w30: BAT_K.5 BAT_K.2 ; C35.2 U8.5 4557.97,3649.59 4583.73,3649.59 4616.55,3682.4 U8.3 4667.4,3682.4 4715,3730 4715,3775 v2(4710,3780)
  Bottom Layer w30: BAT_K.5 3935,4285 3990,4230 3990,4170 4120,4040 4660,4040 4710,3990 v2(4710,3780)
BAT-: +3.3V_D.1 +3.3V_D.3 +3.3V_D.5 +5V_D.1 +5V_D.3 +5V_D.5 BAT.1 C1.2 C25.2 C26.1 C28.2 C29.1 C30.1 C33.2 C35.1 C37.2 KEY_RESET.1 P9.2 P9.4 R1.2 R14.1 R36.2 R41.1 R42.2 U1.14 U6.1 U7.1 U8.1 | length 10381.5
  Top Layer w10: v1(4015,2060) 4025,2050 4065,2050 4111.02,2096.02 U1.14
  Top Layer w25: R1.2 4565.9,2730 4698.5,2730 KEY_RESET.1@4954.41,2730
  Top Layer w30: U7.1 3518.52,3629.94 3491.1,3657.36 C30.1 3497.02,3534.08 3497.02,3352.98 3590,3260 v2(3610,3260) 3710,3260 3735,3235 3735,3218.47 U6.1 ; C28.2 4080.9,3662.36 C29.1 4170.72,3540 4249.03,3461.69 4249.03,3318.31 4248.5,3317.78 4248.5,3278.5 v2(4198.5,3278.5) C25.2 4195,3166.26 4195,3085 4175.9,3065.9 C26.1 v2(4265,3030) ; 4190,3540 4365,3540 v2(4401.1,3576.1)
  Top Layer w35: +3.3V_D.5 +3.3V_D.3 ; v2(2730,4250) +5V_D.5 +5V_D.3 ; +5V_D.1 3047.6,4060 R36.2 R42.2 ; R14.1 3846.1,2361.1 3870,2385 C1.2 ; v2@4396.1,3971.1 C37.2 4360,3895 4330,3865 4330,3770 4370,3730 R41.1 C35.1 v2(4401.1,3576.1) ; U8.1 4697.01,3607.6 4697.01,3605.74 4720,3582.75 v2(4720,3570)
  Bottom Layer w25: v2(4265,3030) 4300,2995 4915,2995 4954.41,2955.59 KEY_RESET.1@4954.41,2730
  Bottom Layer w30: v2(3610,3260) 3640,3260 3715,3335 4142,3335 v2(4198.5,3278.5) ; P9.4 P9.2 4700,4190 4765,4125 4885,4125 4910,4150 4910,4275 BAT.1@4965,4330
  Bottom Layer w35: +3.3V_D.3 +3.3V_D.1 2725,4055 +5V_D.5 ; v2(2730,4250) 2795,4315 3130,4315 3270,4175 3270,4110 3415,3965 4395,3965 v2(4400,3970) ; +5V_D.3 +5V_D.1 ; v1(4015,2060) 4030,2060 4070,2100 4070,2285 3975,2380 v2(3850,2380) 3810,2380 3770,2420 3770,2695 3820,2745 4683.5,2745 KEY_RESET.1@4698.5,2730 ; v2@4422.2,3570 v2(4720,3570)
  other v1: 4945,3620 5030,3620 4940,3700 5030,3700 4940,3785 5030,3785 4940,3865 5030,3865 4940,3950 5030,3950 4940,4045 5030,4045 4940,4130 5030,4130 4940,4205 5030,4205
BAT_IN+: C37.1 L2.2 P9.1 R40.2 | length 668.4
  Top Layer w35: R40.2 4470.9,3820 C37.1 4599.84,3895 L2.2 4604.84,4089.84 4645,4130 4755,4130 4800,4175 P9.1 P9.1@4800,4205
BOOT0: R21.2 U2.60 | length 1954.9
  Top Layer w10: v1(2065,3365) 2010,3365 1975,3400 1975,3470 2005,3500 R21.2 ; v1(2829.75,3420) 3001.75,3248 3092,3248 3274.17,3065.83 U2.60
  Bottom Layer w10: v1(2065,3365) 2074.44,3365 2229.44,3520 2729.75,3520 v1(2829.75,3420)
BOOT1: R22.1 U2.28 | length 2794.8
  Top Layer w10: R22.1@2080,3815 2010,3815 1959,3764 1959,3393.37 1960,3392.37 1960,3090 2010,3040 v1(2170,3040) ; v1(3408.28,2770) 3411.96,2766.31 U2.28
  Bottom Layer w10: v1(2170,3040) 2194,3016 2999,3016 3090,2925 3345,2925 3408.28,2861.72 v1(3408.28,2770)
CMOUT: R12.2 S_OUT.2 U1.8 | length 735.1
  Top Layer w10: U1.8 4378.98,2096.02 4418.5,2056.5 R12.2 4512.6,2032.4 4554,1991 4554,1888.37 4603.37,1839 4709.5,1839 S_OUT.2
DGND: BAT1.2 BLUETOOTH.3 BOOT_SW.5 BOOT_SW.6 C9.2 C10.2 C11.2 C12.1 C13.1 C14.1 C15.1 C16.2 C17.2 C18.2 C19.2 C20.2 C21.1 C22.1 C23.1 C24.1 KEY0.1 KEY1.1 KEY2.1 OLED.1 POWER.2 Q1.1 R26.2 R35.2 R36.1 RESET_KEY.2 SD_CARD.3 SD_CARD.6 SWD.5 TEMP.1 U2.12 U2.18 U2.31 U2.47 U2.63 U3.1 USART.4 Y2. Y3. | length 16230.3
  Top Layer w10: C18.2 3150,2995 3215.11,2929.89 U2.63 3215.11,2758.39 v1(3228.5,2745) ; C23.1 3126.1,2327.6 3158.5,2360 3193.5,2360 3215.11,2381.61 U2.18 3215.11,2535.11 v1(3225,2545) 3196.54,2573.46 U2.12 ; v1(3455,2545) 3471.02,2528.98 U2.31 3471.02,2325.08 C20.2 ; v1(3455,2745) 3480.31,2770.31 U2.47 3603.3,2770.31 3658.5,2825.51 C19.2
  Top Layer w25: TEMP.1 2068.5,2671.5 2130,2610 2130,2448.58 2088.39,2406.97 2086.97,2406.97 2068.5,2388.5 BLUETOOTH.3 2113.5,2310 2330.32,2310 Y2.@2340,2319.68 ; BOOT_SW.5@2210,3605 BOOT_SW.5 BOOT_SW.6 2335,3715 2370,3750 2453.02,3750 POWER.2 ; v2(2340,2980) 2375,2945 2375,2807.44 2325,2757.44 2340,2757.44 2412.56,2757.44 2458,2712 Y3. ; v2(2635,2510) 2786.1,2510 2801.1,2525 C12.1 C15.1 C13.1 C14.1 ; Q1.1 R35.2 2720,2935 v2(2730,2945) ; C11.2 2803.5,2337.4 C24.1 2609.93,2445.97 2474.03,2445.97 2473.7,2446.3 2347.08,2319.68 Y2.@2340,2319.68 ; C17.2 C16.2 2967.6,2182.4 v2(2970,2180) ; v2(2850,3245) 2920,3175 v2@2985,3175 ; v2(2945,3820) 2977.6,3820 C9.2 3052.6,3990.2 R36.1 ; v2(3050,2180) 3050,2163.68 2901.32,2015 2565,2015 2560,2010 2500,2010 2488.5,2021.5 C22.1 C21.1 2390,2185 2338.5,2236.5 2340,2238 2340,2304.68 Y2.@2340,2319.68 ; C18.2 C10.2 3150,3085 v2(3160,3075) ; RESET_KEY.2@3543.5,1470 3799.41,1470 3927.59,1470 3932.59,1465 4188.5,1465 4307.59,1465 4563.5,1465 4712.59,1465 KEY2.1@4968.5,1465
  Top Layer w30: v2(3110,2235) 3110,2237.8 3126.1,2253.9 C23.1 ; C20.2 3496.1,2336.1 v2(3535,2375) ; C19.2 3686.71,2885.81 3720.81,2885.81 3725,2890 v2(3725,2940) ; v2(4510,2830) 4520,2820 4925,2820 4990,2885 4990,3405 4950,3445 SWD.5 4885,3445 4850,3410 4850,3295.87 4811.53,3257.4 R26.2
  Bottom Layer w10: v1(3225,2545) v1(3455,2545) v1(3455,2745) v1@3230,2745
  Bottom Layer w25: BLUETOOTH.3 2090,2355 2180,2265 2390,2265 v2(2635,2510) ; TEMP.1 2111.48,2745 BAT1.2 2241.48,2961.48 2260,2980 v2(2340,2980) 2695,2980 v2(2730,2945) v2@2740,2935 ; BOOT_SW.5 2270,3555 2738.59,3555 2860.75,3432.84 2860.75,3407.16 2849.29,3395.71 2860.75,3384.25 2860.75,3347.29 SD_CARD.3 ; BOOT_SW.6 2255,3760 2275,3760 2420,3905 2860,3905 v2(2945,3820) ; SD_CARD.6 2558.54,3443.54 2611.5,3496.5 2709.4,3496.5 2816.9,3389 2846,3389 2853.82,3381.18 SD_CARD.3 ; v2(2850,3245) 2850,3336.54 SD_CARD.3 ; v2(2970,2180) v2(3050,2180) 3055,2180 v2(3110,2235) ; v2(2995,3180) 3000,3180 3105,3075 v2(3160,3075) ; U3.1 3113.5,1416.5 3150,1380 3335,1380 3425,1470 RESET_KEY.2@3543.5,1470
  Bottom Layer w30: v2(3535,2375) 3536,2374 3536,1971.04 3567.57,1939.47 3570.53,1939.47 3588.5,1921.5 OLED.1 3595.5,1883 3595.5,1522 RESET_KEY.2@3543.5,1470 ; v2(3725,2940) 3836,2829 4517.5,2829 USART.4
  other v1: 2505,1410 2365,1415 2435,1415 1960,1440 2435,1485 2505,1485 2365,1490 1960,1510 2365,1580 2430,1580 2505,1580 1955,1585 2365,1655 2425,1655 2505,1655 1955,1680 2365,1725 2425,1730 2510,1730 1955,1765 2365,1795 2435,1795 2515,1795 1955,1840 2880,1845 2590,1850 2785,1850 2365,1855 2435,1855 2510,1855 2685,1855 1955,1920 2515,1920 2590,1920 2685,1920 2780,1920 2880,1920 2365,1925 2435,1925 3275,2575 3330,2575 3385,2575 3275,2640 3330,2640 3385,2640 3275,2700 3330,2700 3385,2700
EN: BLUETOOTH.1 U2.8 | length 1364.7
  Top Layer w10: v1(3023.5,2645) 3030.71,2652.21 U2.8
  Bottom Layer w10: BLUETOOTH.1@2068.5,2545 BLUETOOTH.1 2068.5,2643.5 2077.62,2652.62 2095.88,2670.88 2105,2680 2120,2680 2235,2795 2985,2795 3035,2745 3035,2656.5 v1(3023.5,2645) v1@3020,2645
FBEEP: R34.2 T_P24.1 U2.2 | length 955.8
  Top Layer w10: T_P24.1 2408.5,2966.5 2447.4,2927.6 R34.2 2498.5,2875 2544.03,2829.47 2966.4,2829.47 3025.87,2770 3128.19,2770 U2.2
KEY0: KEY0.2 T_P14.1 U2.25 | length 1721.7
  Top Layer w10: U2.25 3352.91,2358.22 3372,2339.13 3372,2285.27 3306,2219.27 3306,1737.5 3364.5,1679 3470.13,1679 3551.13,1760 3748.5,1760 T_P14.1 3813.5,1780 3928.5,1665 3932.59,1665 KEY0.2@4188.5,1665
KEY1: KEY1.2 T_P15.1 U2.26 | length 2095.2
  Top Layer w10: U2.26 3372.59,2361.16 3388,2345.75 3388,2278.64 3322,2212.64 3322,1744.13 3371.13,1695 3463.5,1695 3544.5,1776 3689.5,1776 3733.5,1820 3828.5,1820 T_P15.1 3923.5,1780 3993.5,1710 4262.59,1710 4307.59,1665 KEY1.2@4563.5,1665
KEY2: KEY2.2 T_P16.1 U2.27 | length 2476
  Top Layer w10: U2.27 3392.28,2364.1 3404,2352.38 3404,2272.01 3338,2206.01 3338,1755.5 3378.5,1715 3458.5,1715 3525.69,1782.19 3528.06,1782.19 3537.87,1792 3680.5,1792 3728.5,1840 3913.5,1840 T_P16.1 4027.5,1726 4269.22,1726 4280.22,1715 4662.59,1715 4712.59,1665 KEY2.2@4968.5,1665
LED1: DS1.2 U2.41 | length 268.7
  Top Layer w10: U2.41 3627.47,2652.21 3643.77,2668.5 3774.9,2668.5 DS1.2
LED2: DS2.2 U2.44 | length 281.5
  Top Layer w10: U2.44 3612.13,2711.26 3654.37,2753.5 3769.9,2753.5 DS2.2
LED3: DS3.2 U2.45 | length 310.6
  Top Layer w10: U2.45 3609.19,2730.95 3647.75,2769.5 3693,2769.5 3803.56,2880.06 DS3.2
NetBAT1_1: BAT1.1 D2.1 | length 141.3
  Top Layer w10: v1(2903.5,2951.5) D2.1
  Bottom Layer w10: v1(2903.5,2951.5) 2903.5,2890.15 BAT1.1
NetC6_2: C6.2 U1.24 Y1.2 | length 398.4
  Top Layer w10: U1.24 4160,2285.24 4160,2350 4225,2415 4225,2487.87 Y1.2 4227.13,2552.13 4252.4,2577.4 C6.2
NetC7_2: C7.2 U1.23 Y1.1 | length 399.5
  Top Layer w10: C7.2@3942.4,2475 C7.2 3965,2470 3985,2490 Y1.1 4100,2490 4140.15,2449.85 4140.15,2349.54 ; U1.23 4140.07,2349.47
NetC36_1: C36.1 L2.1 U8.2 | length 367.7
  Top Layer w10: U8.2 4750,3645 4813.5,3708.5 L2.1
NetC36_2: C36.2 U8.6 | length 395.4
  Top Layer w10: U8.6 4553.38,3576.62 4605,3525 4745,3525 4820.9,3600.9 C36.2
NetD3_1: BEEP.2 D3.1 Q1.3 | length 620.9
  Top Layer w10: BEEP.2 2575,3250 2623.5,3201.5 D3.1 2623.5,3101.26 Q1.3
NetDS0_1: POWER.1 R32.1 | length 99.7
  Top Layer w10: POWER.1 2465,3665.09 R32.1
NetDS1_1: DS1.1 R27.2 | length 77.7
  Top Layer w10: DS1.1 3971.04,2700.06 R27.2
NetDS2_1: DS2.1 R29.2 | length 79.7
  Top Layer w10: DS2.1 3966.16,2790.06 R29.2
NetDS3_1: DS3.1 R30.2 | length 77.7
  Top Layer w10: DS3.1 3971.04,2880.06 R30.2
NetL1_1: L1.1 U5.3 | length 177.9
  Top Layer w10: U5.3 4563.5,3267.48 L1.1
NetP1_1: R10.1 S_IN.1 T_P6.1 | length 212.6
  Top Layer w10: R10.1 S_IN.1 T_P6.1
NetP1_2: R9.1 S_IN.2 T_P5.1 | length 214.7
  Top Layer w10: R9.1 4848.5,1995 S_IN.2 T_P5.1
NetP1_3: R8.1 S_IN.3 T_P4.1 | length 212.6
  Top Layer w10: R8.1 S_IN.3 T_P4.1
NetP1_4: R7.1 S_IN.4 T_P3.1 | length 212.6
  Top Layer w10: R7.1 S_IN.4 T_P3.1
NetP1_5: R5.1 S_IN.5 T_P2.1 | length 212.6
  Top Layer w10: R5.1 S_IN.5 T_P2.1
NetP1_6: R3.1 S_IN.6 T_P1.1 | length 217.6
  Top Layer w10: R3.1 S_IN.6 T_P1.1
NetQ1_2: Q1.2 R34.1 R35.1 | length 161.9
  Top Layer w10: R34.1 2589.76,3002.4 Q1.2 R35.1
NetR2_2: R2.2 R4.1 T_P7.1 U2.38 | length 816.7
  Top Layer w10: U2.38 3626.65,2593.15 3630,2596.5 3630,2604.73 3643.77,2618.5 3663.23,2618.5 3748.5,2533.23 T_P7.1 3790,2478.5 3790,2258.5 3823.5,2225 R4.1 3800,2177.4 3800,2095 3835,2060 R2.2
NetR3_2: R3.2 U1.1 | length 469.3
  Top Layer w10: U1.1 4544.57,2249.57 4661.1,2366.1 R3.2
NetR4_2: R4.2 U1.20 | length 176.7
  Top Layer w10: R4.2 3977.64,2225 3997.14,2244.5 4029.86,2244.5 4044.48,2229.88 U1.20
NetR5_2: R5.2 U1.2 | length 421.2
  Top Layer w10: U1.2 4595.98,2229.88 R5.2
NetR6_1: R6.1 T_P8.1 U2.35 | length 1000.2
  Top Layer w10: U2.35 3639.92,2534.1 3642.52,2531.5 3660.23,2531.5 3677,2514.73 3677,2468.5 3623.5,2415 3623.5,2290 3653.5,2260 T_P8.1 3748.5,2251.5 3785,2215 3785,2185.03 3784,2184.03 3784,2036 3805,2015 3873.27,2015 3884.19,2025.92 3884.19,2028.38 3885.81,2030 3885.81,2106.79 R6.1
NetR6_2: R6.2 U1.19 | length 234
  Top Layer w10: R6.2 3970,2145 3990,2165 3990,2214.73 4003.77,2228.5 4023.23,2228.5 4041.73,2210 4084.76,2210 U1.19
NetR7_2: R7.2 U1.3 | length 396.4
  Top Layer w10: U1.3 4655.9,2210.2 R7.2
NetR8_2: R8.2 U1.4 | length 429.7
  Top Layer w10: U1.4 4534.49,2190.51 4625,2100 R8.2
NetR9_2: R9.2 U1.5 | length 473.1
  Top Layer w10: U1.5 4504.17,2170.83 4666.1,2008.9 R9.2
NetR10_2: R10.2 U1.6 | length 576.7
  Top Layer w10: U1.6 4501.23,2151.14 4590,2062.37 4590,1925 4615,1900 R10.2
NetR11_1: R11.1 T_P10.1 U1.15 U2.39 | length 1372.3
  Top Layer w10: U2.39 3610.73,2612.83 3642.89,2645 v1(3655,2645) 3703.5,2645 T_P10.1 ; R11.1 3980,1985.9 3980,2066.5 v1(4013.5,2100) 4044.96,2131.46 U1.15
  Bottom Layer w10: v1(3655,2645) 3655,2629.73 3597.5,2572.23 3597.5,2238.31 3735.81,2100 v1(4013.5,2100)
NetR14_2: R14.2 U1.21 | length 199
  Top Layer w10: R14.2 3935.9,2290 4065,2290 4085,2270 U1.21 U1.21
NetR15_1: R15.1 U1.13 | length 157.1
  Top Layer w10: R15.1 4140.07,2018.98 U1.13
NetR17_1: R17.1 U1.29 | length 645.5
  Top Layer w10: v1(4325,2275) 4330,2270 4515,2270 4590,2345 4590,2466.1 R17.1
  Bottom Layer w10: v2(4178.5,2190) 4263.5,2275 v1(4325,2275)
NetR21_1: BOOT_SW.3 R21.1 | length 141.2
  Top Layer w10: BOOT_SW.3 2110,3537.4 R21.1 R21.1@2155,3507.6
NetR22_2: BOOT_SW.4 R22.2 | length 122.6
  Top Layer w10: BOOT_SW.4 2145,3750 2145,3812.6 R22.2
NetR33_1: R33.1 U3.8 | length 567.7
  Top Layer w10: U3.8 3040,1735 3095,1680 3160,1680 3185,1705 3185,1825 3085,1925 3085,2021.1 R33.1
NetR38_1: R38.1 R39.2 U5.5 | length 681.4
  Top Layer w10: R38.1 4470.9,3445 R39.2 4576.1,3461.1 4624,3509 4806,3509 4816,3499 4816,3374.23 4807.58,3365.81 4725.81,3365.81 4717.4,3357.4 U5.5
NetR40_1: R40.1 R41.2 U8.4 | length 213.2
  Top Layer w10: R40.1 4401.1,3804.8 R41.2 4505.78,3730 U8.4
NetT_P9_1: T_P9.1 U1.18 U2.36 | length 971.5
  Top Layer w10: U2.36 3651.03,2553.78 v1(3652.25,2555) ; v1(4013.5,2205) 4027.99,2190.51 U1.18
  Bottom Layer w10: v1@3648.5,2555 v1(3652.25,2555) 3652.25,2539.48 3677,2514.73 3677,2445.87 3652.25,2421.12 3652.25,2300 ; v1(3748.5,2355) 3707.25,2355 3652.25,2300 ; v1(4013.5,2205) 4003.5,2215 3737.25,2215 3652.25,2300
NetT_P11_1: T_P11.1 U1.16 U2.37 | length 1225.3
  Top Layer w10: U2.37 3631.96,2573.46 v1(3653.5,2595) 3693,2555.5 3693,2455.5 3708.5,2440 T_P11.1 ; v1(4013.5,2135) 4029.64,2151.14 U1.16
  Bottom Layer w10: v1(3653.5,2595) 3613.5,2555 3613.5,2244.94 3738.44,2120 3998.5,2120 v1(4013.5,2135)
NetT_P12_1: T_P12.1 U1.17 U2.34 | length 840.2
  Top Layer w10: U2.34 3644.09,2514.41 v1(3653.5,2505) ; v1(3748.5,2170) T_P12.1@3748.5,2185 ; v1(4014.33,2170.83) U1.17
  Bottom Layer w10: v1(3653.5,2505) 3653.5,2445 3633.5,2425 3633.5,2285 3742.94,2175.56 v1@3748.5,2175.56 ; v1(3748.5,2170) 4013.5,2170 v1(4014.33,2170.83)
NRF_CE: T_P21.1 U2.20 U3.3 | length 1098.9
  Top Layer w10: U3.3 U3.3@3128.5,1535 ; T_P21.1 U3.3@3128.5,1535 ; U2.20 3254.48,1585.98 3248.5,1580 3173.5,1580 U3.3@3128.5,1535
NRF_CS: T_P22.1 U2.24 U3.4 | length 1438.1
  Top Layer w10: U2.24 3333.22,2355.28 3348.5,2340 v1(3348.5,2295)
  Bottom Layer w10: v1(3225,1425) 3165,1485 3055,1485 3013.5,1526.5 U3.4 2961.89,1535 2955,1541.88 2955,1771.5 3290,2106.5 3290,2304.73 3303.77,2318.5 3325,2318.5 v1(3348.5,2295)
NRF_IRQ: R33.2 U2.15 | length 687.8
  Top Layer w10: v1(3023.5,2395) 3023.5,2257.41 3155.9,2125.01 R33.2 ; v1(3023.5,2500) 3023.5,2520 3033.5,2530 3053.5,2530 3069.09,2514.41 U2.15
  Bottom Layer w10: v1(3023.5,2395) 3047,2418.5 3047,2481.5 3028.5,2500 v1(3023.5,2500)
OSC32: C14.2 U2.3 Y3.2 | length 504.5
  Top Layer w10: Y3.2 2723.5,2785 2751.97,2813.47 2863.5,2813.47 2890.9,2786.07 C14.2 ; C14.2@2890.9,2750 2910.9,2770 3003.25,2770 3022.62,2750.63 U2.3
OSC33: C13.2 U2.4 Y3.1 | length 559.7
  Top Layer w10: C13.2 2967.38,2690 3008.33,2730.94 U2.4
  Bottom Layer w10: Y3.1 2765,2685 2785,2705 2985,2705 v1(3010,2730)
OSCIN: C15.2 R28.2 U2.5 Y2.2 | length 1120
  Top Layer w10: R28.2 2279.72,2687.4 2325,2642.13 Y2.2@2340,2642.13 ; C15.2@2886.77,2590 C15.2 2890.9,2605.9 2959,2674 2974.01,2674 3006.51,2706.5 3051.5,2706.5 3056.26,2711.26 U2.5
  Bottom Layer w10: Y2.2@2347.12,2635 2387.12,2595 2880,2595 v1(2950,2665)
OSCOUT: C12.2 R28.1 U2.6 Y2.1 | length 1229.6
  Top Layer w10: R28.1 2188.5,2521.5 2275,2435 2429.17,2435 2463.97,2469.8 2483.43,2469.8 2483.76,2469.47 2850.37,2469.47 C12.2 2928.5,2510 2943.5,2525 2943.5,2620.86 3013.14,2690.5 3127.42,2690.5 U2.6
PA15: FREE_I/O.1 U2.50 | length 1631.7
  Top Layer w10: FREE_I/O.1 3335,4305 3335,3610 3471.02,3473.98 U2.50
PB7: FREE_I/O.6 U2.59 | length 1825.5
  Top Layer w10: FREE_I/O.6 2889.47,4250.53 2889.47,3382.9 3008.37,3264 3111,3264 3293.85,3081.15 U2.59
PB8: FREE_I/O.7 U2.61 | length 2011.6
  Top Layer w10: FREE_I/O.7 2667,4373 2667,3273 2798.47,3141.53 3175.84,3141.53 3254.48,3062.89 U2.61
PB9: FREE_I/O.8 U2.62 | length 2052.1
  Top Layer w10: FREE_I/O.8 2651,4289 2651,3254 2779.47,3125.53 3169.22,3125.53 3234.8,3059.95 U2.62
PB12: U2.33
PC9: U2.40
PC10: FREE_I/O.2 U2.51 | length 1673.7
  Top Layer w10: FREE_I/O.2 3160,4395 3319,4236 3319,3603.37 3451.33,3471.04 U2.51
PC11: FREE_I/O.3 U2.52 | length 1698.2
  Top Layer w10: FREE_I/O.3 3303,4137 3303,3596.75 3431.65,3468.1 U2.52
PC12: FREE_I/O.4 U2.53 | length 1731.5
  Top Layer w10: FREE_I/O.4 3287,4053 3287,3590.12 3411.96,3465.15 U2.53
PD2: FREE_I/O.5 U2.54 | length 1791
  Top Layer w10: FREE_I/O.5 2887.69,4395 2928.21,4354.47 2928.6,4354.47 3271,4012.08 3271,3579 3392.28,3457.72 3392.28,3245.95 3393.5,3244.73 3393.5,3225.27 3392.28,3224.05 U2.54
RESET: C11.1 R18.1 RESET_KEY.1 U2.7 | length 2031.4
  Top Layer w10: v1(2948.5,2345) C11.1 R18.1 2918.5,2425 2963.5,2470 2963.5,2618.23 3017.16,2671.89 U2.7 ; RESET_KEY.1@3543.5,1670 RESET_KEY.1@3799.41,1670
  Bottom Layer w10: v1@2945,2345 v1(2948.5,2345) 3420,2345 3510,2255 3510,1703.5 RESET_KEY.1@3543.5,1670
RLDIN: S_OUT.5 U1.11 | length 547.1
  Top Layer w10: U1.11 4179.44,2020.56 4220.03,1979.97 4220.03,1854.97 4245,1830 4435,1830 4468.5,1796.5 S_OUT.5
RLDINV: C4.2 R12.1 R13.1 S_OUT.4 U1.10 | length 706.4
  Top Layer w10: U1.10 4199.13,2048.24 4237.37,2010 C4.2 4265.04,1936.06 R13.1 4266.1,1883.9 4285,1865 4395,1865 4420,1890 4420,1928.5 ; R12.1 4418.5,1930 4420,1928.5 ; S_OUT.4 4420,1928.5
RLDOUT: C4.1 R13.2 S_OUT.3 U1.9 | length 747.1
  Top Layer w10: U1.9 4218.81,2051.18 4229.31,2040.69 4301.28,2040.69 C4.1 ; R13.2 4340.9,2001.06 C4.1 ; S_OUT.3 4635,1780 4540,1875 4540,1879.75 4538,1881.75 4538,1982 4525.81,1994.19 4375.81,1994.19 4360,2010 C4.1
RLDREF: C5.1 S_OUT.6 U1.12 | length 482.6
  Top Layer w10: U1.12 4159.76,1966.14 C5.1 4187.6,1962.4 4204.03,1945.97 4204.03,1831.88 4255.91,1780 S_OUT.6
RSTB: KEY_RESET.2 R16.1 U1.25 | length 935.3
  Top Layer w10: U1.25 4179.44,2344.45 4230,2395 4286.1,2395 R16.1 4301.1,2426.1 4330,2455 4370,2455 4395,2480 4395,2505 v1(4410,2520) ; KEY_RESET.2@4698.5,2530 KEY_RESET.2@4954.41,2530
  Bottom Layer w10: v1(4410,2520) 4420,2530 KEY_RESET.2@4698.5,2530
SCL: OLED.3 T_P27.1 U2.29 | length 470.1
  Top Layer w10: U2.29 3431.65,2131.85 T_P27.1 OLED.3
SD_CS: R19.1 SD_CARD.1 U2.58 | length 966.8
  Top Layer w10: v1(3000,3435) 2980,3415 2980,3315 3015,3280 3047.4,3280 R19.1 3129.47,3307.6 3129.47,3272.45 3313.54,3088.38 U2.58
  Bottom Layer w10: v1(3000,3435) 3035,3435 3050,3420 SD_CARD.1
SDA: OLED.4 T_P25.1 U2.30 | length 356.1
  Top Layer w10: U2.30 3451.33,2222.17 T_P25.1 3578.5,2200 OLED.4
SPI1_M0SI: T_P20.1 U2.23 U3.6 | length 1325.2
  Top Layer w10: v1(3313.5,2295) U2.23 U2.23
  Bottom Layer w10: v1(3225,1850) 3135,1850 3060,1775 3060,1681.5 U3.6 2983.5,1635 2971,1647.5 2971,1762.5 3313.5,2105 v1(3313.5,2295)
SPI1_MISO: T_P19.1 U2.22 U3.7 | length 2128.7
  Top Layer w10: U3.7 3113.5,1790 3103.5,1800 3000,1800 2937.5,1737.5 2937.5,1396 2958.5,1375 3288.5,1375 3288.5,1574.75 3290,1576.25 3290,2304.73 3293.85,2308.59 U2.22
  Bottom Layer w10: U3.7 v1(3225,1735)
SPI1_SCK: T_P23.1 U2.21 U3.5 | length 1689
  Top Layer w10: T_P23.1 U3.5 3098.5,1635 3048.5,1685 2978.5,1685 2953.5,1660 2953.5,1515 2976,1492.5 3236,1492.5 3268.5,1525 3268.5,1577.37 3274,1582.87 3274,2427.63 U2.21
SPI3_MISO: R25.1 SD_CARD.7 U2.56 | length 1649.1
  Top Layer w10: R25.1 3255,3270 3352.91,3172.09 U2.56
  Bottom Layer w10: SD_CARD.7 2463.07,3266.93 2698,3032 3267,3032 3340,3105 v1@3340,3190
  other v1: 3345,3180
SPI3_MOSI: R20.1 SD_CARD.2 U2.57 | length 863.5
  Top Layer w10: R20.1 3333.22,3139.37 U2.57
  Bottom Layer w10: SD_CARD.2 2952,3308 3025,3235 v1(3240,3235)
SPI3_SCK: R23.1 SD_CARD.5 U2.55 | length 1280.8
  Top Layer w10: R23.1 3372.59,3265 U2.55
  Bottom Layer w10: SD_CARD.5 2656.97,3303.03 2770,3190 2845.91,3190 2871.91,3216 3225.77,3216 3230.27,3211.5 3346.5,3211.5 v1(3370,3235)
STATE: BLUETOOTH.6 U2.9 | length 1697.6
  Top Layer w10: v1(3023.5,2610) 3046.02,2632.52 U2.9
  Bottom Layer w10: BLUETOOTH.6 2018.5,2105 2018.5,2393.5 2035,2410 2120,2410 2155,2375 2155,2345 2211.5,2288.5 2380.27,2288.5 2599,2507.23 2599,2524.91 2620.09,2546 2649.91,2546 2650.91,2545 2958.5,2545 v1(3023.5,2610)
SWCLK: R26.1 SWD.4 U2.49 | length 1655.1
  Top Layer w10: U2.49 3613.77,2980 3823.5,2980 3829.5,2974 4582.56,2974 4732.55,3123.99 4742.49,3123.99 4773.5,3155 R26.1 4903.5,3312.6 SWD.4
SWDIO: R24.1 SWD.3 U2.46 | length 1608.4
  Top Layer w10: U2.46 3606.25,2750.63 3641.12,2785.5 3684,2785.5 3753.5,2855 3753.5,2895.22 3816.28,2958 4589.19,2958 4680.37,3049.19 4766.1,3049.19 4766.1,3080 R24.1 4903.5,3217.4 SWD.3
UART1_RX: U2.43 USART.3 | length 1271.5
  Top Layer w10: U2.43 3615.08,2691.58 3653.5,2730 v1(3728.5,2730)
  Bottom Layer w10: v1(3728.5,2730) 3789.5,2791 4636,2791 4703.5,2858.5 USART.3
UART1_TX: U2.42 USART.2 | length 1355.4
  Top Layer w10: U2.42 3624.53,2671.89 3647.64,2695 v1(3728.5,2695)
  Bottom Layer w10: v1(3728.5,2695) 3808.5,2775 4678.5,2775 4803.5,2900 USART.2
UART2_RX: BLUETOOTH.5 T_P18.1 U2.16 | length 1369.7
  Top Layer w10: BLUETOOTH.5 T_P18.1 ; v1(3023.5,2430) 3110,2430 3130,2450 3130,2493.22 U2.16
  Bottom Layer w10: BLUETOOTH.5 2440,2155 2534,2249 2534,2309.91 2555.09,2331 2726,2331 2763.5,2368.5 2962,2368.5 v1(3023.5,2430)
UART2_TX: BLUETOOTH.4 T_P17.1 U2.17 | length 1521.7
  Top Layer w10: BLUETOOTH.4 2168.5,2255 T_P17.1 ; v1(3023.5,2465) 3038.12,2465 3048.12,2475 3057.38,2475 3067.38,2465 v1(3082,2465) v1@3085,2465 ; v1(3080,2395) 3085,2395 3100,2380 3115,2380 3162.8,2427.8 U2.17
  Bottom Layer w10: BLUETOOTH.4 2148.5,2175 2435,2175 2518,2258 2518,2316.54 2548.46,2347 2719.37,2347 2756.87,2384.5 2933,2384.5 v1@3013.5,2465 ; v1(3080,2395) 3082,2397 v1(3082,2465)
USB+: MINI_USB.1 USB_K.3 USB_K.4 | length 1387.2
  Top Layer w25: MINI_USB.1 3632.99,4142.01 3637.99,4137.01 3637.99,4027.01 3665,4000 4095,4000 4190,4095 4190,4340 4235,4385 USB_K.4 USB_K.3
USB+_K: P9.5 USB_K.2 USB_K.5 | length 558.8
  Bottom Layer w25: USB_K.5 USB_K.2 4598.03,4285 4661.06,4348.03 4743.03,4348.03 P9.5@4797.5,4402.5
USB-: MINI_USB.5 P9.6 | length 1361.8
  Top Layer w30: MINI_USB.5 3507.01,4296.87 3507.57,4297.43 3515.18,4297.43 3607.75,4390 3790,4390 3860,4460 4675,4460 4700,4435 P9.6@4700,4405
V+: +5V_D.2 +5V_D.4 +5V_D.6 BLUETOOTH.2 C25.1 C26.2 C28.1 C29.2 P9.3 U6.3 U7.3 | length 6485.5
  Top Layer w25: v2(1936.5,2670) 1936.5,2483.5 1965,2455 BLUETOOTH.2 ; +5V_D.6 +5V_D.4 ; v2(4080,3765) 4080,3883.5 C28.1 ; C26.2 4091.1,3020 4035,3020 3998.53,3056.47 U6.3 C29.2@3998.53,3532.43 ; C25.1 4095,3390 4006.1,3478.9 C29.2 C29.2@3998.53,3532.43 ; P9.3@4800,4305 4756.97,4348.03 4530.95,4348.03 4519.89,4336.97 4396.97,4336.97 4360,4300 4360,4166.5 C28.1 ; C29.2@3998.53,3532.43 3995.97,3535 3920,3535 3888.53,3566.47 U7.3 3895,3636.4 3895,3790 3990,3885 C28.1
  Bottom Layer w25: v2(1936.5,2670) 1936.5,3954.42 1985.11,4003.03 2224.89,4003.03 2225.95,4001.97 2295.22,4001.97 2300.22,4006.97 2632.19,4006.97 2635.22,4010 2660,4010 2710,3960 +5V_D.6 ; +5V_D.4 +5V_D.2 3155,3960 3350,3765 v2(4080,3765)
VBAT: D1.2 D2.2 U2.1 | length 358.1
  Top Layer w10: D1.2 D2.2 2948.5,2870 3028.5,2790 U2.1
VDDA: C16.1 C17.1 R31.1 U2.13 | length 820.7
  Top Layer w10: C16.1 2960.69,2107.6 3006,2152.91 3006,2194.91 2999,2201.91 2999,2518.13 3032.37,2551.5 3034.73,2551.5 3037.01,2553.78 U2.13
  Top Layer w15: R31.1 2808.5,2112.6 C17.1 C16.1
WCT: S_OUT.1 T_P13.1 U1.7 | length 840.6
  Top Layer w10: U1.7 4463.54,2131.46 T_P13.1 4515,2095 4570,2040 4570,1895 4610,1855 4820,1855 4868.5,1806.5 S_OUT.1
pads on no net: BAT1.0 BAT_K.1 BAT_K.6 MINI_USB.2 MINI_USB.3 MINI_USB.4 MINI_USB.6 MINI_USB.7 MINI_USB.8 MINI_USB.9 MINI_USB.MH1 MINI_USB.MH2 SD_CARD.8 SD_CARD.9 SD_CARD.10 SD_CARD.11 SD_CARD.12 U2.11 U2.14 USB_K.1 USB_K.6 Y1.

## Keep-outs
Keep-Out Layer:
  lines w10: 5105,1330 1850,1330 1850,4580 5105,4580 5105,1335

## Other copper
Top Layer:
  rectangle net BAT-: 3880,2350 3950,2415
  rectangle net BAT-: 4085,2075 4125,2120
  rectangle net RLDINV: 4235,1860 4495,1890
  rectangle net +3.3V_A: 4525,3350 4570,3405

## Silkscreen, mask and mechanical layers (free items; w line width, h text height)
Top Overlay:
  drawing of 1743 lines, arcs and shapes, not listed
  text "POWER_SW" at 4625,4510 h40
  text "+" at 4960,4490 h40
  text "ECG_V1.9_ZZU_WFY" at 1930,4250 h40
  text "-" at 4965,4230 h40
  text "-" at 1880,4055 h40
  text "+" at 1885,3935 h40
  text "1" at 2210,3805 h40
  text "GND" at 2320,3585 h40 r90
  text "2" at 2210,3480 h40
  text "GND" at 4975,3425 h40
  text "CLK" at 4975,3330 h40
  text "DIO" at 4975,3230 h40
  text "VCC" at 4975,3120 h40
  text "VCC" at 4975,3020 h40
  text "EN" at 2000,2520 h40 r90
  text "V+" at 2000,2425 h40 r90
  text "V-" at 2005,2330 h40 r90
  text "TX" at 2000,2230 h40 r90
  text "SDA" at 3700,2140 h40 r90
  text "RX" at 2000,2125 h40 r90
  text "S" at 2000,2040 h40 r90
  text "SCL" at 3700,2020 h40 r90
  text "+" at 3485,1975 h40
  text "-" at 3485,1865 h40
  text "IRQ" at 2610,1720 h40
  text "MISO" at 2795,1720 h40
  text "MOSI" at 2600,1610 h40
  text "SCK" at 2805,1610 h40
  text "CE" at 2820,1515 h40
  text "CS" at 2620,1510 h40
  text "NRFL240L1" at 2215,1505 h40 r90
  text "VCC" at 2620,1415 h40
  text "GND" at 2810,1405 h40

## Text inside footprints (layer, text, board x,y; h text height)
P9: Top Overlay "1" at 4820,4120 h40 r90; Top Overlay "2" at 4715,4110 h40 r90; Top Overlay "5" at 4820,4460 h40 r90; Top Overlay "6" at 4720,4460 h40 r90
U6: Top Overlay "1" at 3780.13,3327.94 h40; Top Overlay "3" at 3960.13,3327.94 h40
U7: Top Overlay "1" at 3670.13,3802.94 h40; Top Overlay "3" at 3850.13,3802.94 h40